# Altium PCB PCB.PcbDoc
Units mm, origin at the board's own origin, x right, y up, seen from the top; angles counter-clockwise.
Board outline 60.07 x 40 mm, 2 copper layers (Top Layer, Bottom Layer); 22 components, 22 nets, 120 pads, 21 vias.
Unrouted connection lines stored in the file: 1.
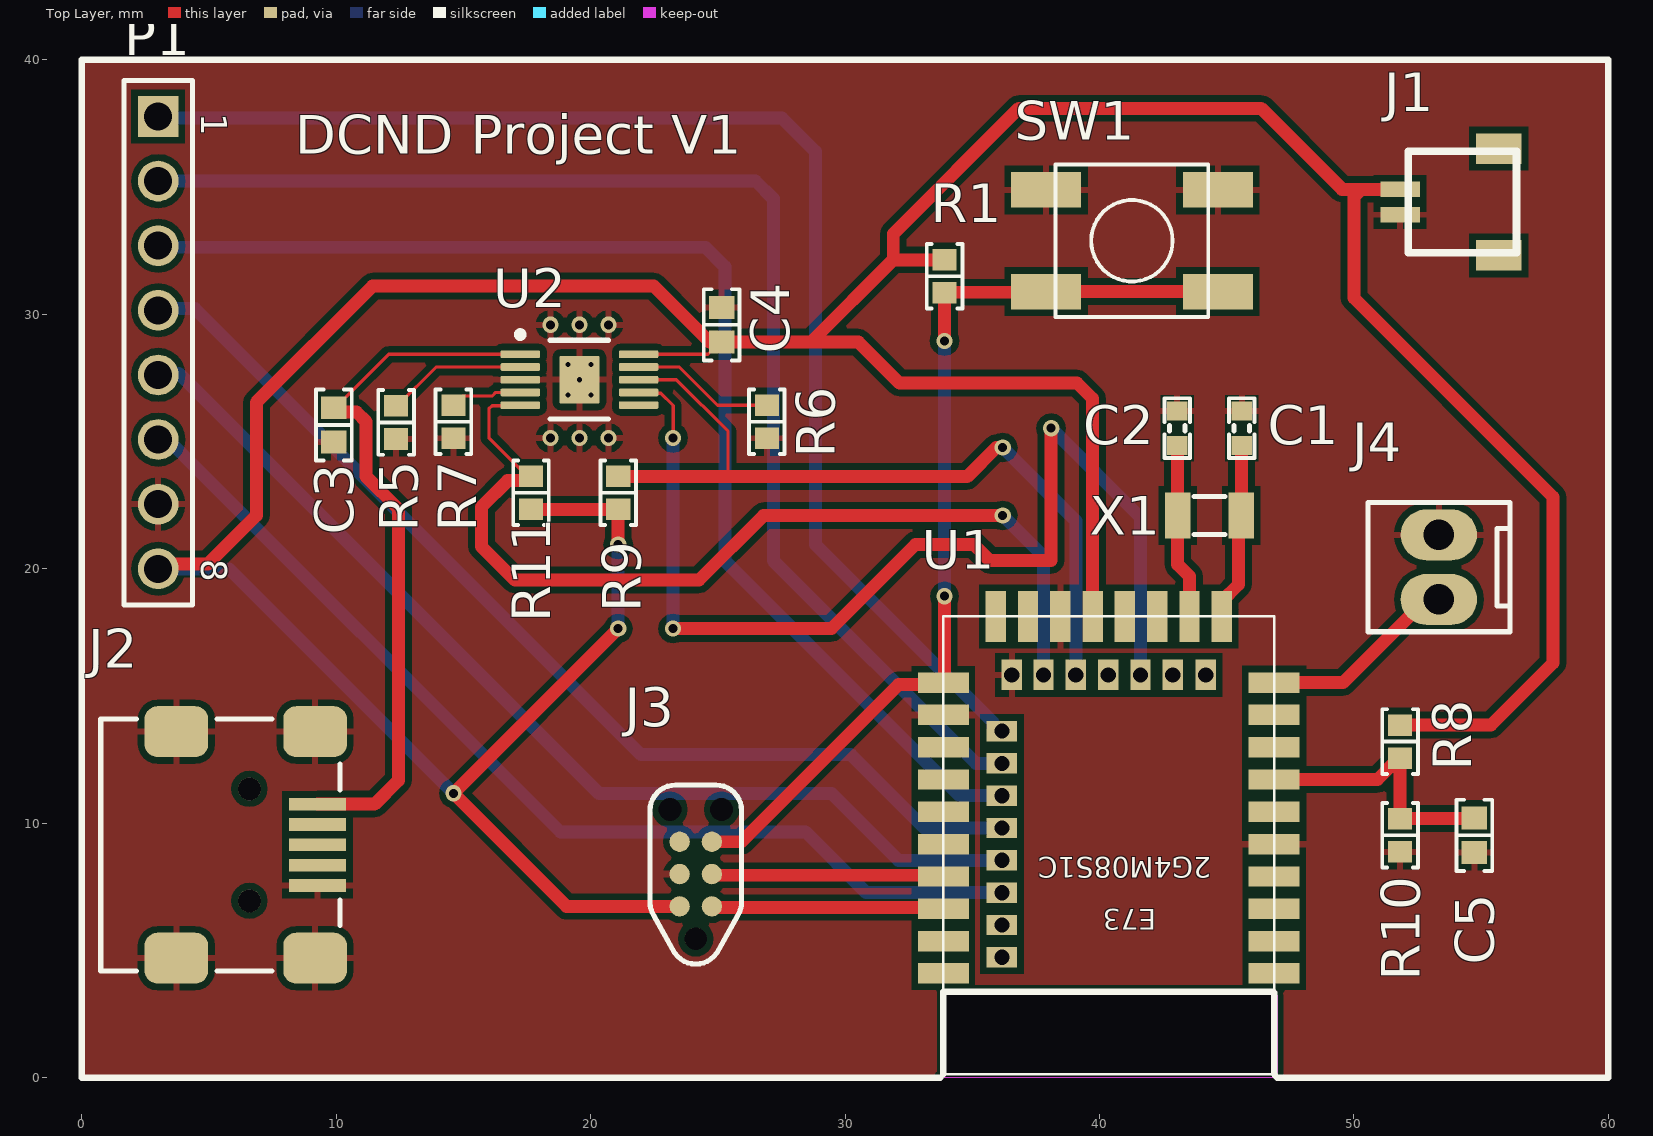
[diagram p0: Top Layer view]
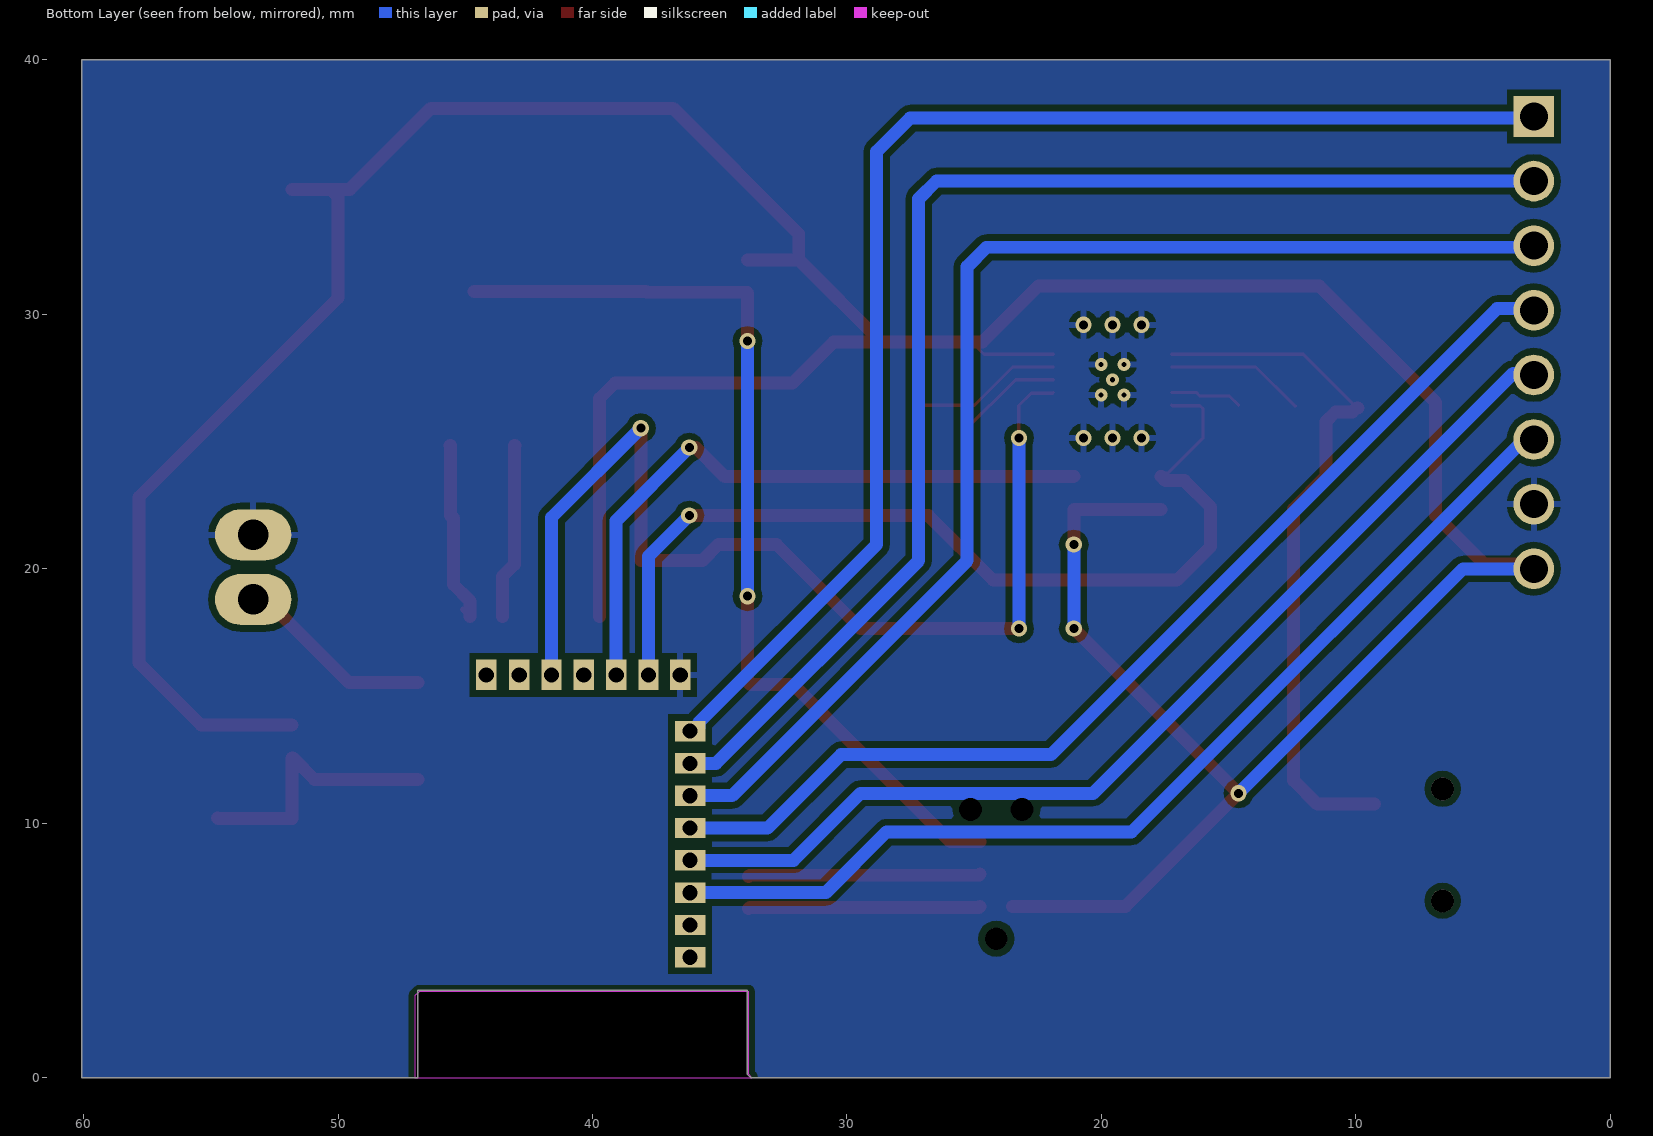
[diagram p1: Bottom Layer view, seen from below]
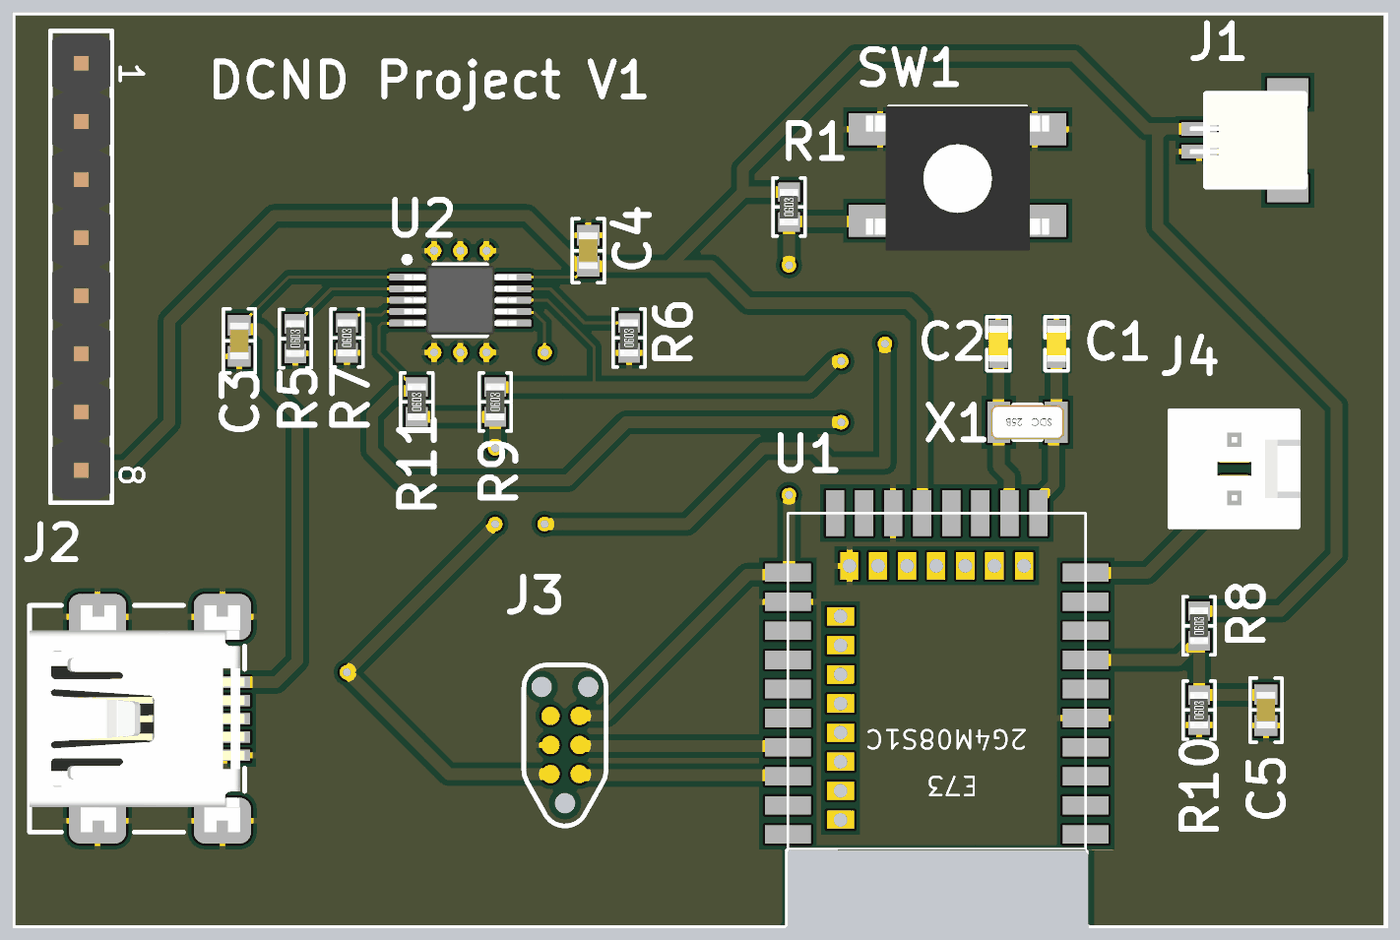
[diagram p2: 3D render of the assembled board from above, using the file's embedded part models]

## Layer stack, top to bottom
Top Solder: solder mask 0.0102, Solder Resist, Dk 3.5
Top Layer: signal copper 0.0356
Dielectric 1: dielectric 0.32, FR-4, Dk 4.8
Bottom Layer: signal copper 0.0356
Bottom Solder: solder mask 0.0102, Solder Resist, Dk 3.5

## Board outline
33.782,0 33.909,0.127 33.909,3.429 46.863,3.429 46.863,0 60.071,0 60.071,40.005 0,40.005 0,0
cut-out: 33.736,0 33.863,0.127 33.863,3.383 46.817,3.383 46.99,3.21 46.99,0

## Design rules (kind name [scope] priority, off if disabled: settings)
Clearance [All] p1: gap=0.254 ignorepadtopadclearanceinfootprint=FALSE except(0: Arc-Hole Track-Hole SMDPad-Hole THPad-Hole Via-Hole Fill-Hole Poly-Hole Region-Hole Text-Hole)
PolygonConnect [All] p1: connectstyle=Relief reliefconductorwidth=0.254 reliefentries=4 polygonreliefangle="90 Angle" airgapwidth=0.254
RoomDefinition Sheet [InComponentClass('Sheet')] p1: confinementstyle=ConfineIn formatcopy=TRUE lockcomponents=FALSE outline 0,0 50.8,0 50.8,25.4 0,25.4
RoutingVias [All] p1: holewidth=0.711 width=1.27 viastyle="Through Hole" minholewidth=0.355 minwidth=0.635 maxholewidth=0.711 maxwidth=1.27
SolderMaskExpansion [All] p1: expansion=0.102
Width [All] p1: maxlimit=0.508 minlimit=0.127 preferedwidth=0.254
30 further rules are at their usual default settings.

## Components (designator, comment, footprint, x,y, rotation, side; value= is the part's Value field where it differs from the comment)
C1 "4.7µF" CAPC1608X06L 45.593,25.527 r270 top
C2 "4.7µF" CAPC1608X06L 43.053,25.527 r270 top
C3 "1µF" "CAP 0603_1608" 9.906,25.654 r90 top
C4 "1µF" "CAP 0603_1608" 25.146,29.591 r270 top
C5 "10000pF" "CAP 0603_1608" 54.737,9.525 r90 top
J1 "HDR-2, 1mm" SM02B-SRSS-TB 51.816,34.417 r90 top
J2 "10033526-N3212LF" "FCI USB 10033526-N3212LF" 5.436,9.149 r90 top
J3 "ICD connector" TC2030-MCP-NL 24.13,8.001 r90 top
J4 "0022272021" "MOLEX KK 0022272021" 53.34,20.066 r90 top
P1 "61300811121" 61300811121 3,28.89 r270 top
R1 "NC" "RES 0603_1608" 33.909,31.496 r90 top
R5 "1 kOhms" "RES 0603_1608" 12.352,25.752 r90 top
R6 "10 kOhms" "RES 0603_1608" 26.924,25.781 r90 top
R7 "2 kOhms" "RES 0603_1608" 14.605,25.781 r90 top
R8 "820 kOhms" "RES 0603_1608" 51.816,13.208 r90 top
R9 "10 kOhms" "RES 0603_1608" 21.082,22.987 r90 top
R10 "2 MOhms" "RES 0603_1608" 51.816,9.525 r90 top
R11 "10 kOhms" "RES 0603_1608" 17.653,22.987 r90 top
SW1 "PB SW" Switch-PB-6.2x6.3mm-SMD 41.275,32.893 r180 top
U1 "E73-2G4M08S1C" E73-2G4M08S1C 46.847,18.111 r180 top
U2 "BQ24090DGQT" DGQ0010D_M 19.558,27.432 r0 top
X1 "32.768kHz" XTAL_3215 44.323,22.098 r180 top

## Footprints (in the part's own frame and the unit in brackets; to place one, negate y for a bottom-side part, rotate by r counter-clockwise, add the part's x,y. Pads: shape width x height; smd on the part's side, far side on the other; paste and mask are expansions set on the pad)
61300811121 [mm] "Pin Header, pitch 2.54 mm, THT, Vertical, single row, 8p"
  rect 1.6x1.6 hole 1.1: 1(-8.89,0)
  round 1.6 hole 1.1: 2(-6.35,0) 3(-3.81,0) 4(-1.27,0) 5(1.27,0) 6(3.81,0) 7(6.35,0) 8(8.89,0)
  silkscreen extent -10.31,-1.35 10.31,1.35, body extent -10.16,-1.27 10.16,1.27, height 8.57
"CAP 0603_1608" [mm] "Chip Capacitor, 2-Leads, Body 1.60x0.80mm, IPC Medium Density"
  rect 0.9x1 smd: 1(-0.675,0) 2(0.675,0)
  silkscreen extent -1.4,-0.7 1.4,0.7, body extent -0.8,-0.41 0.8,0.41, height 0.82
CAPC1608X06L [mm]
  rect 0.75x0.8 smd: 1(-0.675,0) 2(0.675,0)
  silkscreen extent -1.17,-0.5 1.17,0.5, body extent -0.8,-0.43 0.8,0.43, height 0.8
DGQ0010D_M [mm] "TSOP, 10-Leads, Body 3.1x3.1mm, Pitch 0.5mm, Thermal Pad 1.88x1.57mm, IPC Low Density"
  rrect33% 1.55x0.3 smd: 1(-2.325,1) 2(-2.325,0.5) 3(-2.325,0) 4(-2.325,-0.5) 5(-2.325,-1) 6(2.325,-1) 7(2.325,-0.5) 8(2.325,0) 9(2.325,0.5) 10(2.325,1)
  rrect6% 1.57x1.88 smd: 11(0,0)
  silkscreen extent -2.45,-1.55 1.15,1.9, body extent -2.45,-1.5 2.45,1.5, height 0.94
E73-2G4M08S1C [mm]
  rect 2x0.8 smd: 1(-0.016,14.014) 2(-0.016,12.744) 3(-0.016,11.474) 4(-0.016,10.204) 5(-0.016,8.934) 6(-0.016,7.664) 7(-0.016,6.394) 8(-0.016,5.124) 9(-0.016,3.854) 10(-0.016,2.584) 26(12.984,2.584) 27(12.984,3.854) 29(12.984,5.124) 31(12.984,6.394) 33(12.984,7.664) 35(12.984,8.934) 37(12.984,10.204) 39(12.984,11.474) 41(12.984,12.744) 43(12.984,14.014)
  rect 0.8x2 smd: 11(2.039,-0.016) 13(3.309,-0.016) 15(4.579,-0.016) 17(5.849,-0.016) 19(7.119,-0.016) 21(8.389,-0.016) 23(9.659,-0.016) 25(10.929,-0.016)
  rect 0.8x1.2 hole 0.6: 12(2.674,2.284) 14(3.967,2.284) 16(5.237,2.284) 18(6.507,2.284) 20(7.777,2.284) 22(9.047,2.284) 24(10.294,2.284)
  rect 1.2x0.8 hole 0.6: 28(10.684,4.489) 30(10.684,5.759) 32(10.684,7.029) 34(10.684,8.299) 36(10.684,9.569) 38(10.684,10.839) 40(10.684,12.109) 42(10.684,13.379)
  silkscreen extent -0.02,-0.02 12.98,17.98
"FCI USB 10033526-N3212LF" [mm] "USB 2.0 Type B Mini"
  rect 0.5x2.25 smd: 1(1.6,-3.826) 2(0.8,-3.826) 3(0,-3.826) 4(-0.8,-3.826) 5(-1.6,-3.826)
  round 0.9 hole 0.9 unplated: M(-2.2,-1.151) M(2.2,-1.151)
  rrect50% 2x2.5 smd: S(-4.45,-3.731) S(-4.45,1.719) S(4.45,-3.731) S(4.45,1.719)
  silkscreen extent -4.95,-4.71 4.95,4.69, body extent -4.95,-4.7 4.95,4.7, height 4.01
"MOLEX KK 0022272021" [mm]
  oval 2x3 hole 1.2: 1(-1.27,0) 2(1.27,0)
  silkscreen extent -2.54,-2.79 2.54,2.79, body extent -2.54,-2.9 2.54,2.9, height 11.7
"RES 0603_1608" [mm] "Chip Resistor, 2-Leads, Body 1.60x0.80mm, IPC Medium Density"
  rect 0.85x0.95 smd: 1(-0.65,0) 2(0.65,0)
  silkscreen extent -1.27,-0.7 1.27,0.7, body extent -0.8,-0.4 0.8,0.4, height 0.45
SM02B-SRSS-TB [mm]
  rect 1.2x1.8 smd: 0(-2.1,-3.875) 0(2.1,-3.875)
  rect 0.6x1.55 smd: 1(-0.5,0) 2(0.5,0)
  silkscreen extent -2,-4.57 2,-0.33, body extent -1.99,-4.58 1.99,0.41, height 3
Switch-PB-6.2x6.3mm-SMD [mm]
  rect 2.75x1.4 smd: 1(-3.375,2) 1(3.375,2) 2(-3.375,-2) 2(3.375,-2)
  silkscreen extent -3,-3 3,3, body extent -4,-3 4,3.3, height 3.1
TC2030-MCP-NL [mm] "Conector ICD en placa"
  round 0.8 smd paste-0.4: 1(-1.27,-0.635) 2(-1.27,0.635) 3(0,-0.635) 4(0,0.635) 5(1.27,-0.635) 6(1.27,0.635)
  round 0.85 hole 0.9 unplated mask+0: ""(-2.54,0) ""(2.54,-1.016) ""(2.54,1.016)
  silkscreen extent -3.54,-1.8 3.5,1.8, body extent -3.54,-1.8 3.5,1.8
XTAL_3215 [mm]
  rect 1x1.8 smd: 1(-1.25,0) 2(1.25,0)
  silkscreen extent -0.6,-0.75 0.6,0.75, body extent -1.6,-0.75 1.6,0.75, height 0.81

## Part data
C1 C2: library part CAP_0603, "Capacitor, X7R, ±10%", Manufacturer=Samsung, Manufacturer Part Number=CL10B475KQ8NQNC, Part Number=C0603-4µ7-6.3V-X7R, Supplier part number=1276-2087-1-ND, Artikkelnr Noca=20039473, Artikkelnr Simpro=N.A., Datasheet=http://media.digikey.com/pdf/Data%20Sheets/Samsung%20PDFs/CL10B475KQ8NQNC_Spec.pdf, Footprint Doc=0603, LatestRevisionDate=2015-06-10, Note=6.3V, Pin Count=2, Published=2015-06-10, Publisher="Nordic Semiconductor", Supplier=Digi-Key
C3 C4: library part JMK107BJ105KK-T, "CAP CER 1UF 6.3V X5R 0603", Device Package="0603 (1608 Metric)", Manufacturer="Taiyo Yuden", Operating Temperature="-55°C ~ 85°C", Supplier Part Number 1=587-1993-1-ND, Temperature Coefficient=X5R, Tolerance=±10%, Voltage - Rated=6.3V, Applications="General Purpose", Capacitance=1µF, ComponentLink1Description=Datasheet, ComponentLink1URL=https://www.yuden.co.jp/productdata/catalog/mlcc01_e.pdf, ComponentLink2Description="DigiKey Link", ComponentLink2URL=http://digikey.com/product-detail/en/taiyo-yuden/JMK107BJ105KK-T/587-1993-1-ND/1646655, LastUpdated="21/01/2020 00:02:08", Lifecycle Status=Active, Minimum Order=1, Mounting Type="Surface Mount, MLCC", Package / Case="0603 (1608 Metric)", Packaging=TapeAndReel, PartId=2858, Part Number=JMK107BJ105KK-T, Part Status=Active, Price=0.02, Series=M, Size / Dimension="0.063\" L x 0.031\" W (1.60mm x 0.80mm)", Supplier 1=DigiKey, Thickness (Max)="0.020\" (0.50mm)"
C5: library part C0603C103K4RECAUTO, "CAP CER 0603 10NF 16V X7R 10%", Device Package="0603 (1608 Metric)", Manufacturer=KEMET, Operating Temperature="-55°C ~ 125°C", Ratings=AEC-Q200, Supplier Part Number 1=399-17880-1-ND, Temperature Coefficient=X7R, Tolerance=±10%, Voltage - Rated=16V, Applications="Automotive, ESD Protection", Capacitance=10000pF, ComponentLink1Description=Datasheet, ComponentLink1URL=https://api.kemet.com/component-edge/download/datasheet/C0603C103K4RECAUTO.pdf, ComponentLink2Description="DigiKey Link", ComponentLink2URL=http://digikey.com/product-detail/en/kemet/C0603C103K4RECAUTO/399-17880-1-ND/8640547, LastUpdated="21/01/2020 00:02:00", Lifecycle Status=Active, Minimum Order=1, Mounting Type="Surface Mount, MLCC", Package / Case="0603 (1608 Metric)", Packaging=TapeAndReel, PartId=8251, Part Number=C0603C103K4RECAUTO, Part Status=Active, Price=0.02, Series="ESD SMD Auto X7R", Size / Dimension="0.063\" L x 0.031\" W (1.60mm x 0.80mm)", Supplier 1=DigiKey, Thickness (Max)="0.034\" (0.87mm)"
J1: library part SM02B-SRSS-TB, "1.0mm pitch connector side entry SMD", Manufacturer=JST, Manufacturer Part Number=SM02B-SRSS-TB(LF)(SN), Part number IPS=00000007791, Supplier part number=455-1802-1-ND, Artikkelnr Noca=55010030, Artikkelnr Simpro=N.A., Datasheet=http://www.jst-mfg.com/product/pdf/eng/eSH.pdf, Footprint Doc=SM02B-SRSS-TB, LatestRevisionDate=2016-06-20, Note="JST, Header", Part Number=SM02B-SRSS-TB, Pin Count=2, Published=2016-06-20, Publisher="Nordic Semiconductor", Supplier=Digi-Key
J2: "CONN RCPT MINI USB B 5POS SMD RA", Current Rating (Amps)="1A per Contact", Manufacturer="Amphenol ICC (FCI)", Operating Temperature="-25°C ~ 85°C", Supplier Part Number 1=609-4700-2-ND, Voltage - Rated=30V, ComponentLink1Description=Datasheet, ComponentLink1URL=http://www.amphenol-icc.com/media/wysiwyg/files/drawing/10033526.pdf, ComponentLink2Description="DigiKey Link", ComponentLink2URL=//digikey.com/product-detail/en/amphenol-icc-fci/10033526-N3212LF/609-4700-2-ND/4292074, Connector Type="USB - mini B", Features="Board Guide, Solder Retention", Gender=Receptacle, LastUpdated="09/12/2019 20:52:14", Lifecycle Status=0, Mating Cycles=5000, Minimum Order=1, Mounting Feature=Horizontal, Mounting Type="Surface Mount, Right Angle", Number of Contacts=5, Number of Ports=1, Packaging=TapeAndReel, Part Number=10033526-N3212LF, Part Status=Active, Price=0.39, Series=-, Shielding=Shielded, Supplier 1=DigiKey, Termination=Solder
J3: library part TC2030-MCP-NL, "Conector par ICD"
J4: "CONN HEADER VERT 2POS 2.54MM", Insulation Color=Natural, Manufacturer=Molex, Material Flammability Rating="UL94 V-0", Supplier Part Number 1=WM4111-ND, ComponentLink1Description=Datasheet, ComponentLink1URL=https://www.molex.com/pdm_docs/sd/022272021_sd.pdf, ComponentLink2Description="DigiKey Link", ComponentLink2URL=http://digikey.com/product-detail/en/molex/0022272021/WM4111-ND/1130577, Connector Type=Header, Contact Finish - Mating=Tin, Contact Finish - Post=Tin, Contact Finish Thickness - Mating="100.0µin (2.54µm)", Contact Length - Mating="0.295\" (7.49mm)", Contact Length - Post="0.140\" (3.56mm)", Contact Material=Brass, Contact Shape=Square, Contact Type="Male Pin", Fastening Type="Friction Lock", Insulation Height="0.461\" (11.70mm)", Insulation Material="Polyamide (PA), Nylon", LastUpdated="12/01/2020 23:51:43", Lifecycle Status=Active, Minimum Order=1, Mounting Type="Through Hole", Number of Positions=2, Number of Positions Loaded=All, Number of Rows=1, Overall Contact Length="0.560\" (14.22mm)", Packaging=Bulk, PartId=76, Part Number=0022272021, Part Status=Active, Pitch - Mating="0.100\" (2.54mm)", Price=0.27, Series="KK 6410", Shrouding="Shrouded - 1 Wall", Style="Board to Cable/Wire", Supplier 1=DigiKey, Termination=Solder
P1: library part CMP-1502-01076-1, "THT Vertical Pin Header WR-PHD, Pitch 2.54 mm, Single Row, 8 pins", Contact Resistance=20mOhm, Manufacturer="Wurth Elektronik", Operating Temperature=-40to105degC, Rated Current=3A, Withstanding Voltage=500VAC, Working Voltage=250VAC, Datasheet URL=https://katalog.we-online.de/em/datasheet/6130xx11121.pdf, Gender=Male, Manufacturer URL=http://www.we-online.de, Mounting Technology=THT, Orientation=Vertical, Package Reference=61300811121, Packaging=Bag, Part Number=61300811121, Pin Number=8, Pitch=2.54mm, Publisher=WurthElektronik, Row Number=Single
R1: library part RNCS0603BKE10K0, "RES 10K OHM 0.1% 1/16W 0603", Device Package="0603 (1608 Metric)", Manufacturer="Stackpole Electronics Inc", Operating Temperature="-55°C ~ 155°C", Power (Watts)="0.063W, 1/16W", Ratings=AEC-Q200, Resistance="10 kOhms", Supplier Device Package=0603, Supplier Part Number 1=RNCS0603BKE10K0CT-ND, Temperature Coefficient=±25ppm/°C, Tolerance=±0.1%, ComponentLink1Description=Datasheet, ComponentLink1URL=https://www.seielect.com/catalog/sei-rncs_rnch.pdf, ComponentLink2Description="DigiKey Link", ComponentLink2URL=http://digikey.com/product-detail/en/stackpole-electronics-inc/RNCS0603BKE10K0/RNCS0603BKE10K0CT-ND/1800113, Composition="Thin Film", Features="Anti-Corrosive, Automotive AEC-Q200, Moisture Resistant", Height - Seated (Max)="0.022\" (0.55mm)", LastUpdated="21/01/2020 00:25:01", Lifecycle Status=Active, Minimum Order=1, Number of Terminations=2, Package / Case="0603 (1608 Metric)", Packaging=TapeAndReel, PartId=4838, Part Number=RNCS0603BKE10K0, Part Status=Active, Price=0.08, Series=RNCS, Size / Dimension="0.061\" L x 0.031\" W (1.55mm x 0.80mm)", Supplier 1=DigiKey
R5: library part CPF0603B1K0E, "RES SMD 1K OHM 0.1% 1/16W 0603", Device Package="0603 (1608 Metric)", Manufacturer="TE Connectivity Passive Product", Operating Temperature="-55°C ~ 155°C", Power (Watts)="0.063W, 1/16W", Supplier Device Package=0603, Supplier Part Number 1=A119887CT-ND, Temperature Coefficient=±25ppm/°C, Tolerance=±0.1%, ComponentLink1Description=Datasheet, ComponentLink1URL=https://www.te.com/commerce/DocumentDelivery/DDEController?Action=srchrtrv&DocNm=1773200&DocType=DS&DocLang=English, ComponentLink2Description="DigiKey Link", ComponentLink2URL=http://digikey.com/product-detail/en/te-connectivity-passive-product/CPF0603B1K0E/A119887CT-ND/4966485, Composition="Thin Film", Height - Seated (Max)="0.022\" (0.55mm)", LastUpdated="21/01/2020 00:24:55", Lifecycle Status=Active, Minimum Order=1, Number of Terminations=2, Package / Case="0603 (1608 Metric)", Packaging=TapeAndReel, PartId=4877, Part Number=CPF0603B1K0E, Part Status=Active, Price=0.09, Resistance="1 kOhms", Series="CPF, Neohm", Size / Dimension="0.061\" L x 0.031\" W (1.55mm x 0.80mm)", Supplier 1=DigiKey
R6 R9 R11: library part RNCS0603BKE10K0, "RES 10K OHM 0.1% 1/16W 0603", Device Package="0603 (1608 Metric)", Manufacturer="Stackpole Electronics Inc", Operating Temperature="-55°C ~ 155°C", Power (Watts)="0.063W, 1/16W", Ratings=AEC-Q200, Supplier Device Package=0603, Supplier Part Number 1=RNCS0603BKE10K0CT-ND, Temperature Coefficient=±25ppm/°C, Tolerance=±0.1%, ComponentLink1Description=Datasheet, ComponentLink1URL=https://www.seielect.com/catalog/sei-rncs_rnch.pdf, ComponentLink2Description="DigiKey Link", ComponentLink2URL=http://digikey.com/product-detail/en/stackpole-electronics-inc/RNCS0603BKE10K0/RNCS0603BKE10K0CT-ND/1800113, Composition="Thin Film", Features="Anti-Corrosive, Automotive AEC-Q200, Moisture Resistant", Height - Seated (Max)="0.022\" (0.55mm)", LastUpdated="21/01/2020 00:25:01", Lifecycle Status=Active, Minimum Order=1, Number of Terminations=2, Package / Case="0603 (1608 Metric)", Packaging=TapeAndReel, PartId=4838, Part Number=RNCS0603BKE10K0, Part Status=Active, Price=0.08, Resistance="10 kOhms", Series=RNCS, Size / Dimension="0.061\" L x 0.031\" W (1.55mm x 0.80mm)", Supplier 1=DigiKey
R7: library part RT0603BRD072KL, "RES SMD 2K OHM 0.1% 1/10W 0603", Device Package="0603 (1608 Metric)", Manufacturer=Yageo, Operating Temperature="-55°C ~ 155°C", Power (Watts)="0.1W, 1/10W", Supplier Device Package=0603, Supplier Part Number 1=YAG1626CT-ND, Temperature Coefficient=±25ppm/°C, Tolerance=±0.1%, ComponentLink1Description=Datasheet, ComponentLink1URL=https://www.yageo.com/upload/media/product/productsearch/datasheet/rchip/PYu-RT_1-to-0.01_RoHS_L_11.pdf, ComponentLink2Description="DigiKey Link", ComponentLink2URL=http://digikey.com/product-detail/en/yageo/RT0603BRD072KL/YAG1626CT-ND/5139074, Composition="Thin Film", Height - Seated (Max)="0.022\" (0.55mm)", LastUpdated="21/01/2020 00:24:44", Lifecycle Status=Active, Minimum Order=1, Number of Terminations=2, Package / Case="0603 (1608 Metric)", Packaging=TapeAndReel, PartId=5635, Part Number=RT0603BRD072KL, Part Status=Active, Price=0.04, Resistance="2 kOhms", Series=RT, Size / Dimension="0.063\" L x 0.031\" W (1.60mm x 0.80mm)", Supplier 1=DigiKey
R8: library part CRGP0603F820K, "CRGP 0603 820K 1%", Device Package="0603 (1608 Metric)", Manufacturer="TE Connectivity Passive Product", Operating Temperature="-55°C ~ 155°C", Power (Watts)="0.25W, 1/4W", Supplier Device Package=0603, Supplier Part Number 1=A130451CT-ND, Temperature Coefficient=±100ppm/°C, Tolerance=±1%, ComponentLink1Description=Datasheet, ComponentLink1URL=https://www.te.com/commerce/DocumentDelivery/DDEController?Action=srchrtrv&DocNm=9-1773463-9&DocType=DS&DocLang=English, ComponentLink2Description="DigiKey Link", ComponentLink2URL=http://digikey.com/product-detail/en/te-connectivity-passive-product/CRGP0603F820K/A130451CT-ND/8578283, Composition="Thick Film", Features="Pulse Withstanding", Height - Seated (Max)="0.022\" (0.55mm)", LastUpdated="21/01/2020 00:24:55", Lifecycle Status=Active, Minimum Order=1, Number of Terminations=2, Package / Case="0603 (1608 Metric)", Packaging=TapeAndReel, PartId=5029, Part Number=CRGP0603F820K, Part Status=Active, Price=0.02, Resistance="820 kOhms", Series=CRGP, Size / Dimension="0.063\" L x 0.031\" W (1.60mm x 0.80mm)", Supplier 1=DigiKey
R10: library part RMCF0603FT2M00, "RES 2M OHM 1% 1/10W 0603", Device Package="0603 (1608 Metric)", Manufacturer="Stackpole Electronics Inc", Operating Temperature="-55°C ~ 155°C", Power (Watts)="0.1W, 1/10W", Ratings=AEC-Q200, Supplier Device Package=0603, Supplier Part Number 1=RMCF0603FT2M00CT-ND, Temperature Coefficient=±200ppm/°C, Tolerance=±1%, ComponentLink1Description=Datasheet, ComponentLink1URL=https://www.seielect.com/catalog/sei-rmcf_rmcp.pdf, ComponentLink2Description="DigiKey Link", ComponentLink2URL=http://digikey.com/product-detail/en/stackpole-electronics-inc/RMCF0603FT2M00/RMCF0603FT2M00CT-ND/1943145, Composition="Thick Film", Features="Automotive AEC-Q200", Height - Seated (Max)="0.022\" (0.55mm)", LastUpdated="21/01/2020 00:24:27", Lifecycle Status=Active, Minimum Order=1, Number of Terminations=2, Package / Case="0603 (1608 Metric)", Packaging=CutTape, PartId=6213, Part Number=RMCF0603FT2M00, Part Status=Active, Price=0.10, Resistance="2 MOhms", Series=RMCF, Size / Dimension="0.061\" L x 0.031\" W (1.55mm x 0.80mm)", Supplier 1=DigiKey
SW1: library part Switch-PB-6.2x6.3mm-SMD, "Tactile Switch, SPNO, SMD, 160gf, 6.2x6.3x2.5mm", 2nd source part number=688-SKHUALE010, Manufacturer=Dailywell, Manufacturer Part Number=TS604VM1-025BR-R, Part number IPS=00000007812, 2nd source Supplier=Mouser, Artikkelnr Noca=50019106, Artikkelnr Simpro=N.A., Datasheet=\\hizz\pro\app9717\Datasheet\switches\Dailywell\TS604VM1-025BR-R.pdf, Footprint Doc=Switch-PB-6.2x6.3mm-SMD, LatestRevisionDate=2016-04-21, Part Number=Switch-PB-6.2x6.3mm-SMD, Pin Count=4, Published=2010-02-01, Publisher="Nordic Semiconductor", Supplier=Cabcon, Supplier part number=TS604VM1-025BR-R
U2: library part CMP-0321-00918-2, "1 A, Single Input, Single Cell Li-Ion Battery Charger with 10 K ohm NTC, 4.5 V, -40 to 150 degC, 10-pin MSOP-PowerPAD (DGQ), Green (RoHS & no Sb/Br)", Manufacturer="Texas Instruments", Over Voltage Protection=N, Code_JEDEC=MO-187-BA-T, ComponentLink1Description=Datasheet, ComponentLink1URL=http://www.ti.com/general/docs/lit/getliterature.tsp?genericPartNumber=BQ24090&fileType=pdf, DatasheetVersion=SLUS968C, Eco-Plan="Green (RoHS & no Sb/Br)", Lead Acid=N, Li-Ion=N, Li-Polymer=N, Mounting Technology="Surface Mount", NiCd=N, NiMH=N, PackageDescription="10-Pin PowerPAD Plastic Small Outline 0.5 mm Pitch, Exposed Pad", PackageReference=DGQ0010D, PackageVersion="revF, Nov-2011", PartNumber=BQ24090DGQT, SubFamily="Battery Charge Management", Vin(Min)(V)=4.5
X1: library part XTAL_SMD3215, "XTAL SMD 2012, 32.768kHz, 9pF, ±20ppm", Manufacturer=NDK, Manufacturer Part Number=NX3215SA-32.768K-STD-MUA-9, Part Number=XTAL_SMD3215_32.768kHz_9pF_NDK, Artikkelnr Noca=N.A., Artikkelnr Simpro=N.A., Footprint Doc=XTAL_3215, LatestRevisionDate=2017-10-23, Note="XTAL SMD 32.768kHz", Pin Count=2, Published=2017-10-23, Publisher="Nordic Semiconductor"

## Via types
v1: diameter 0.635, hole 0.355, Top Layer to Bottom Layer, 16 vias
v2: diameter 0.5, hole 0.2, Top Layer to Bottom Layer, 5 vias

## Nets (pads, with @x,y where several pads share a name; then routed paths per layer and width w, separated by ;. In a path a pad name is that pad's centre, name@x,y a point inside that pad or via, vN(x,y) a via of type N, cw(c..) or ccw(c..) an arc to the next point about the centre after c; other vN are vias at no path point)
BUSY: P1.1 U1.28 | length 52.3
  Bottom Layer w0.508: P1.1 3.061,37.719 27.515,37.719 28.829,36.405 28.829,20.956 35.817,13.968 35.817,13.768 35.963,13.622 U1.28
CHG: R9.2 U1.20 U2.8 | length 31.9
  Top Layer w0.127: R9.2 R9.2@21.132,23.637 ; U2.8 23.368,27.432 25.4,25.4 25.4,23.622
  Top Layer w0.508: R9.2 21.097,23.622 25.4,23.622 34.798,23.622 35.941,24.765 v1(36.195,24.765)
  Bottom Layer w0.508: v1(36.195,24.765) 39.07,21.89 U1.20
CLK: P1.5 U1.36 | length 41.1
  Bottom Layer w0.508: P1.5 3.066,27.686 3.81,27.686 20.32,11.176 29.464,11.176 32.098,8.542 U1.36
CS: P1.4 U1.34 | length 41.6
  Bottom Layer w0.508: P1.4 3.066,30.226 4.445,30.226 21.971,12.7 30.226,12.7 33.114,9.812 U1.34
DC: P1.3 U1.32 | length 48.9
  Bottom Layer w0.508: P1.3 3.061,32.639 24.511,32.639 25.273,31.877 25.273,20.32 34.511,11.082 U1.32
DIN: P1.6 U1.38 | length 40.7
  Bottom Layer w0.508: P1.6 3.193,25.273 18.814,9.652 28.448,9.652 30.828,7.272 U1.38
GND: C1.1 C2.1 C3.1 C4.1 C5.1 J1.1 J2.5 J2.S J3.4 J4.2 P1.7 R5.1 R6.1 R7.1 R10.1 SW1.2 U1.5 U1.21 U1.24 U1.27 U2.3 U2.11
  other v1: 18.415,25.146 19.558,25.146 20.701,25.146 18.415,29.591 19.558,29.591 20.701,29.591
  other v2: 19.108,26.832 20.008,26.832 19.558,27.432 19.108,28.032 20.008,28.032
ISET2: U1.16 U2.7 | length 43.2
  Top Layer w0.127: U2.7 21.916,26.899 22.761,26.899 23.241,26.419 v1(23.241,25.146)
  Top Layer w0.508: v1(23.241,17.653) 29.464,17.653 32.766,20.955 35.052,20.955 35.687,20.32 38.1,20.32 v1(38.1,25.527)
  Bottom Layer w0.508: v1(23.241,17.653) v1(23.241,25.146) ; v1(38.1,25.527) 41.61,22.017 U1.16
NetC1_2: C1.2 U1.11 X1.1 | length 7.4
  Top Layer w0.254: U1.11 U1.11@45.081,18.4
  Top Layer w0.508: U1.11 44.808,18.727 45.466,19.385 45.466,21.991 X1.1 45.583,22.108 45.583,24.842 C1.2
NetC2_2: C2.2 U1.13 X1.2 | length 6.9
  Top Layer w0.508: C2.2 43.063,24.842 43.063,22.108 X1.2 43.073,20.173 43.538,19.708 U1.13
NetR5_2: R5.2 U2.2 | length 5.5
  Top Layer w0.127: R5.2 12.402,26.402 13.932,27.932 U2.2
NetR6_2: R6.2 U2.9 | length 5.7
  Top Layer w0.127: U2.9 23.483,27.932 24.984,26.431 R6.2
NetR7_2: R7.2 U2.4 | length 2.8
  Top Layer w0.127: R7.2 14.967,26.792 16.128,26.792 16.268,26.932 U2.4
PG: R11.2 U1.22 U2.5 | length 37.7
  Top Layer w0.127: U2.5 17.213,26.411 16.124,26.411 16.002,26.289 16.002,25.146 17.384,23.764 R11.2@17.653,23.764
  Top Layer w0.508: R11.2 17.482,23.466 16.735,23.466 15.704,22.435 15.704,20.872 17.018,19.558 24.257,19.558 26.797,22.098 v1(36.195,22.098)
  Bottom Layer w0.508: v1(36.195,22.098) 37.8,20.493 U1.22
RST: P1.2 U1.30 | length 51
  Bottom Layer w0.508: P1.2 26.482,35.24 27.178,34.544 27.178,20.32 35.146,12.352 U1.30
RST_nRF: J3.5 R1.1 SW1.1 U1.26 | length 37.8
  Top Layer w0.508: J3.5 24.766,9.272 25.927,9.272 32.101,15.446 33.783,15.446 U1.26 33.909,15.573 v1(33.909,18.923) ; v1(33.909,28.956) R1.1 33.933,30.869 37.877,30.869 37.9,30.893 SW1.1@44.65,30.893
  Bottom Layer w0.508: v1(33.909,18.923) v1(33.909,28.956)
RST_SCREEN: J4.1 U1.10 | length 7.8
  Top Layer w0.508: U1.10 49.571,15.527 52.84,18.796 J4.1
SWDCLK: J3.1 U1.39 | length 9.1
  Top Layer w0.508: J3.1 24.812,6.684 33.816,6.684 U1.39
SWDIO: J3.3 U1.37 | length 9.1
  Top Layer w0.508: J3.3 24.812,7.954 33.816,7.954 U1.37
VBAT: C4.2 J1.2 J3.2 P1.8 R1.2 R8.2 R9.1 R11.1 U1.19 U1.23 U2.10 | length 160.9
  Top Layer w0.127: U2.10 24.612,28.432 C4.2@25.096,28.916
  Top Layer w0.508: P1.8 3.193,20.193 4.953,20.193 6.858,22.098 6.858,26.543 11.43,31.115 22.479,31.115 24.678,28.916 25.096,28.916 C4.2 28.662,28.916 ; R11.1 R9.1 v1(21.082,20.955) ; v1(21.082,17.653) v1(14.605,11.176) 19.05,6.731 J3.2 ; R1.2 31.892,32.146 ; U1.19 39.728,26.693 39.116,27.305 32.131,27.305 30.52,28.916 28.662,28.916 ; R8.2 55.387,13.858 57.825,16.296 57.825,22.82 50.002,30.643 50.002,34.619 50.3,34.917 ; J1.2 50.3,34.917 ; 28.662,28.916 31.892,32.146 ; 31.892,32.146 31.892,33.162 36.83,38.1 46.355,38.1 49.538,34.917 50.3,34.917
  Bottom Layer w0.508: P1.8 5.781,20 v1(14.605,11.176) ; v1(21.082,17.653) v1(21.082,20.955)
VBAT_AN: C5.2 R8.1 R10.2 U1.7 | length 10.6
  Top Layer w0.254: R8.1@51.766,12.558 R8.1
  Top Layer w0.508: U1.7 50.925,11.717 R8.1@51.766,12.558 ; R8.1 R10.2 51.829,10.188 54.725,10.188 C5.2
VUSB: C3.2 J2.1 U2.1 | length 27.8
  Top Layer w0.127: C3.2@9.956,26.329 12.059,28.432 U2.1
  Top Layer w0.508: J2.1 11.511,10.749 12.446,11.684 12.446,22.352 11.176,23.622 11.176,25.781 10.795,26.162 10.123,26.162 9.956,26.329 C3.2
pads on no net: J1.0 J2.2 J2.3 J2.4 J2.M J3. J3.6 U1.1 U1.2 U1.3 U1.4 U1.6 U1.8 U1.9 U1.12 U1.14 U1.15 U1.17 U1.18 U1.25 U1.29 U1.31 U1.33 U1.35 U1.40 U1.41 U1.42 U1.43 U2.6

## Polygon pours and split planes (outlines as drawn)
GND on Top Layer "Top Layer-GND" (solid, pour order 0): 0,0 0,40.005 60.071,40.005 60.071,0
GND on Bottom Layer "Bottom Layer-GND" (solid, pour order 2): 0,0 0,40.005 60.071,40.005 60.071,0

## Silkscreen, mask and mechanical layers (free items; w line width, h text height)
Top Overlay:
  lines w0.254: 33.736,0 0,0 0,40 60,40 60,0 46.99,0 46.863,0.127 ; 33.863,0.127 33.863,3.383 46.817,3.383 46.863,3.337 46.863,0.127 ; 46.863,0.127 46.863,0.127
  text "DCND Project V1" at 8.382,36.322 h1.52

## Dimensions
3,20 to 0,0 on Mechanical 15
3,20 to 0,0 on Mechanical 15

## Text inside footprints (layer, text, board x,y; h text height)
P1: Top Overlay "8" at 4.7,20.38 h1.02 r270; Top Overlay "1" at 4.7,37.9 h1.02 r270
U1: Top Overlay "2G4M08S1C" at 44.39,8.653 h0.8 r180; Top Overlay "E73" at 42.231,6.621 h0.8 r180